# EAGLE board Bartosz_Nowakowski (EAGLE 9.6.0)
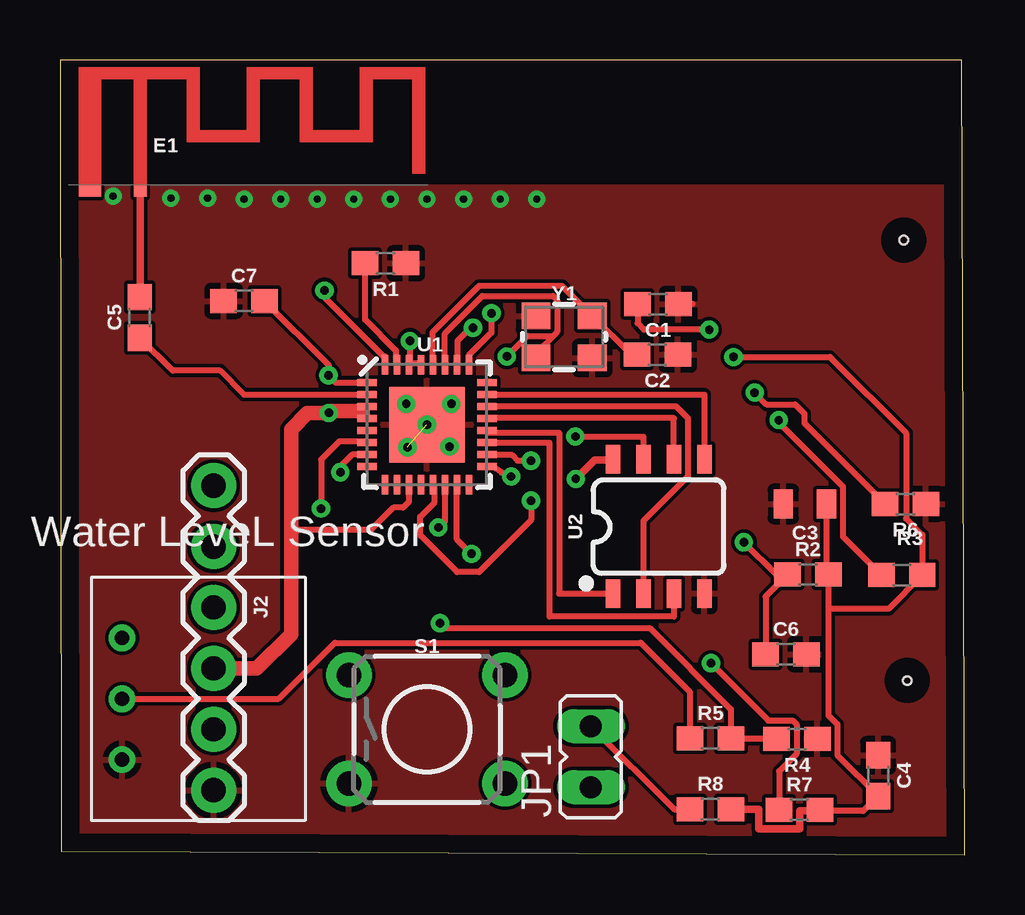
[diagram p0: board, top side]
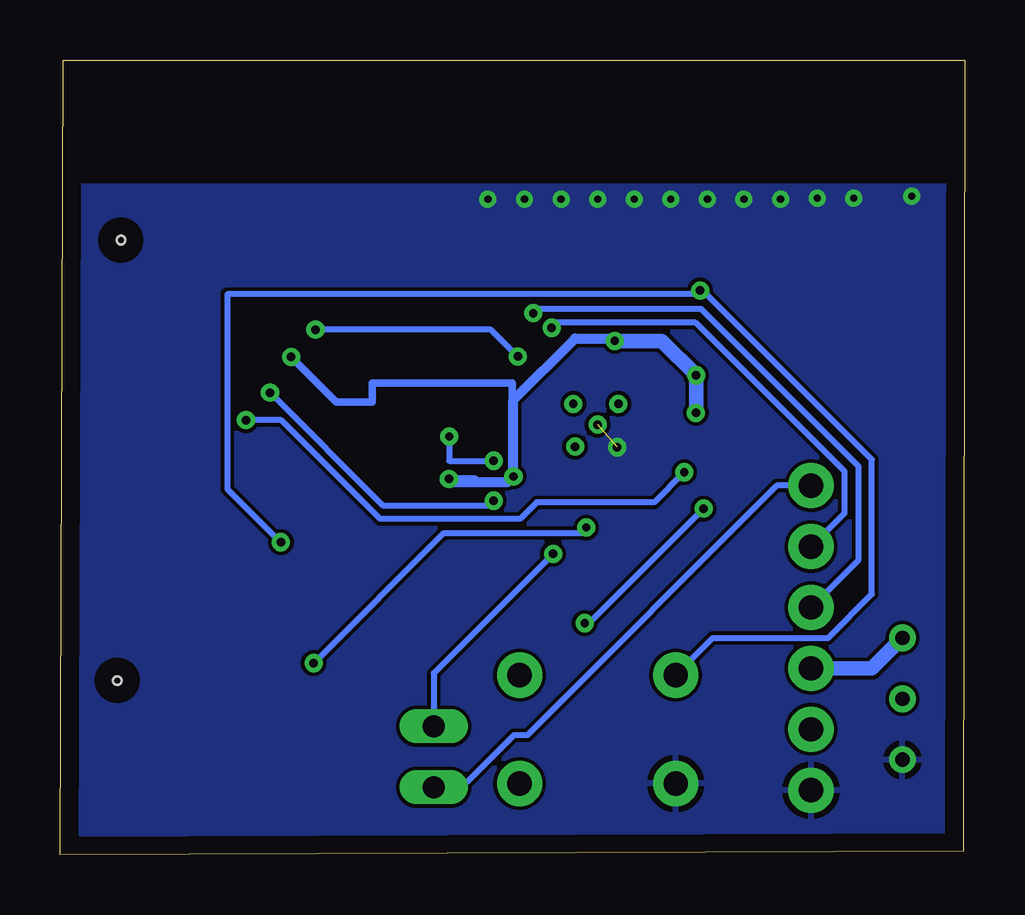
[diagram p1: board, bottom side, seen from below]

Size 37.69 x 33.14 mm. Coordinates in mm from the lower left corner, seen from the top.
Outline: 0.05,0.15 37.69,0 37.57,33.14 0,33.14 0.05,0.15
Copper layers (1*16): Top 0.035mm / dielectric 1.5mm / Bottom 0.035mm
Design rules "default *": minimum track width 10mil, minimum drill 0.35mm, track to track 6mil, track to pad 6mil, pad to pad 6mil, via to via 6mil, smd to smd 6mil, copper to edge 30mil, drill to drill 6mil, minimum pad ring 10mil, minimum via ring 8mil, stop-mask expansion 4mil, vias tented up to drill 0mil, thermal gap 10mil
Holes 0.35 mm at 35.15,25.63 35.31,7.26

## Footprints (pad centres in the part's own frame; a part is rotated, then mirrored left to right if it is on the bottom)
0603 = smd 1.1 x 1: 1 -0.85,0; 2 0.85,0
0805 = smd 0.8 x 1.2: 1 -0.9,0; 2 0.9,0
TRACE_ANTENNA_2.4GHZ_15.2MM = smd 0.5 x 0.5: ANT 0,-0.25 | smd 0.9 x 0.5: GND -2.1,-0.25
FTDI_BASIC = drill 1.016 pad 1.88: CTS 10.16,0; DTR 0,0; GND 12.7,0; RXI 2.54,0; TXO 5.08,0; VCC 7.62,0
JP1 = drill 0.914 long: 1 0,-1.27; 2 0,1.27
TACTILE_SWITCH_PTH_6.0MM_KIT = drill 1.016 pad 1.88: 1 -3.251,2.261; 2 3.251,2.261; 3 -3.251,-2.261; 4 3.251,-2.261
QFN32-5X5MM = smd 0.8 x 0.285: 1 -2.5,1.75; 2 -2.5,1.25; 3 -2.5,0.75; 4 -2.5,0.25; 5 -2.5,-0.25; 6 -2.5,-0.75; 7 -2.5,-1.25; 8 -2.5,-1.75; 17 2.5,-1.75; 18 2.5,-1.25; 19 2.5,-0.75; 20 2.5,-0.25; 21 2.5,0.25; 22 2.5,0.75; 23 2.5,1.25; 24 2.5,1.75 | smd 0.285 x 0.8: 9 -1.75,-2.5; 10 -1.25,-2.5; 11 -0.75,-2.5; 12 -0.25,-2.5; 13 0.25,-2.5; 14 0.75,-2.5; 15 1.25,-2.5; 16 1.75,-2.5; 25 1.75,2.5; 26 1.25,2.5; 27 0.75,2.5; 28 0.25,2.5; 29 -0.25,2.5; 30 -0.75,2.5; 31 -1.25,2.5; 32 -1.75,2.5 | smd 3.15 x 3.15: EP 0,0
SO08 = smd 0.6 x 1.2: 1 -1.905,-2.8; 2 -0.635,-2.8; 3 0.635,-2.8; 4 1.905,-2.8; 5 1.905,2.8; 6 0.635,2.8; 7 -0.635,2.8; 8 -1.905,2.8
WATERLEVELSENSORFT = drill 0.6: GND -7.62,-2.54; OUT -7.62,0; VCC -7.62,2.54
CRYSTAL-SMD-3.2X2.5MM = smd 1.2 x 1.1: 1 -1.175,-0.875; 2 1.175,-0.875; 3 1.175,0.875; 4 -1.175,0.875

## Placement (x,y rotation side)
C1  10pF  [0603]  24.92,22.96 180 top
C2  10pF  [0603]  24.89,20.85 180 top
C3  10uF  [0805]  31.04,14.63 180 top
C4  0.1uF  [0603]  34.09,3.3 270 top
C5  5.6PF  [0603]  3.33,22.4 90 top
C6  0.1uF  [0603]  30.25,8.36 0 top
C7  0.1uF  [0603]  7.67,23.09 0 top
E1  ANTENNA-GROUNDEDTRACE-15.2MM  [TRACE_ANTENNA_2.4GHZ_15.2MM]  3.35,27.94 0 top
J2  6_PIN_SERIAL_CABLEPTH  [FTDI_BASIC]  6.4,15.39 270 top
JP1  1  [JP1]  22.12,4.09 0 top
R1  12k  [0603]  13.56,24.66 180 top
R2  10k  [0603]  31.17,11.68 0 top
R3  10k  [0603]  35.08,11.66 0 top
R4  100k  [0603]  30.71,4.83 180 top
R5  220k  [0603]  27.1,4.85 0 top
R6  10k  [0603]  35.23,14.63 180 top
R7  12k  [0603]  30.81,1.88 0 top
R8  1k  [0603]  27.1,1.91 0 top
S1  MOMENTARY-SWITCH-SPST-PTH-6.0MM-KIT  [TACTILE_SWITCH_PTH_6.0MM_KIT]  15.29,5.23 0 top
U1  ESP8266  [QFN32-5X5MM]  15.29,17.93 0 top
U2  4MB Flash  [SO08]  24.94,13.69 0 top
WATER1  WATERLEVELSENORDEV  [WATERLEVELSENSORFT]  10.21,6.5 0 top
Y1  CRYSTAL-26MHZSMD-3.2X2.5  [CRYSTAL-SMD-3.2X2.5MM]  21.01,21.59 0 top

## Library data of the parts
C1 C2 = SparkFun-Capacitors; PROD_ID: CAP-11812
C3 = SparkFun-Capacitors; PROD_ID: CAP-11330
C4 C6 C7 = SparkFun-Capacitors; PROD_ID: CAP-08604
C5 = SparkFun-Capacitors; PROD_ID: CAP-12456
E1 = SparkFun-RF
J2 = SparkFun-Connectors
JP1 = jumper
R1 R7 = SparkFun-Resistors; PROD_ID: RES-10327
R2 R3 R6 = SparkFun-Resistors; PROD_ID: RES-00824
R4 = SparkFun-Resistors; PROD_ID: RES-07828
R5 = SparkFun-Resistors; PROD_ID: RES-08969
R8 = SparkFun-Resistors; PROD_ID: RES-07856
S1 = SparkFun-Switches; PROD_ID: SWCH-08441; SF_SKU: COM-00097
U1 = SparkFun-RF; PROD_ID: IC-12452
U2 = SparkFun-IC-Memory; PROD_ID: IC-12455
WATER1 = WaterLevel
Y1 = SparkFun-Clocks; PROD_ID: XTAL-12454

## Nets
+3V3: C3.1 C4.2 C7.2 J2.VCC R2.2 R3.2 R7.2 R8.2 U1.1 U1.3 U1.4 U1.11 U1.17 U1.29 U1.30 U2.8 WATER1.VCC
GND: C1.1 C2.1 C3.2 C4.1 C6.2 C7.1 E1.GND J2.GND R1.1 R4.1 R6.1 S1.3 U1.EP U2.4 WATER1.GND Y1.2 Y1.4
GPIO0: JP1.2 R8.1 U1.15
GPIO2: R7.1 U1.14
GPIO15: R6.2 U1.13
N$1: R1.2 U1.31
N$2: C1.2 U1.27 Y1.1
N$3: C2.2 U1.28 Y1.3
N$4: R3.1 U1.7
N$5: C6.1 R2.1 S1.1 U1.32
N$6: C5.1 U1.2
N$7: C5.2 E1.ANT
N$8: R4.2 R5.2 U1.6
N$9: R5.1 WATER1.OUT
N$10: J2.DTR JP1.1
SD_CLK: U1.21 U2.6
SD_CS0: U1.20 U2.1
SD_HD: U1.18 U2.7
SD_SI: U1.23 U2.5
SD_SO: U1.22 U2.2
SD_WP: U1.19 U2.3
U0RXI: J2.TXO U1.25
U0TXO: J2.RXI U1.26

## Tracks (layer width: path | path; a pad name or v marks a point on that pad's centre or on a via)
+3V3  (via drill 0.35)
  Top 0.254: R7.2 31.71,1.83 31.88,1.83 33.46,1.83 C4.2 32.39,4.15 32.39,5.44 32.02,5.81 32.02,10.26 | U1.29 14.97,20.47 14.66,20.47 14.58,20.45 | v18.8,15.77 18.4,15.93 17.98,16.2 U1.17 | v14.58,21.43 14.58,20.45 | 14.58,20.45 U1.30 | 23.04,16.47 U2.8 | C7.2 11.19,20.42 v11.19,19.99 11.5,19.68 U1.1 | U1.11 14.54,14.72 14.3,14.48 13.89,14.48 12.95,13.54 9.93,13.54 9.63,13.23 | 10.31,18.42 10.32,18.42 | 11.27,18.49 v11.2,18.42 | 12.6,18.49 U1.3 U1.4 | 32.02,10.26 R2.2 31.94,11.76 C3.1 | 32.02,10.26 34.53,10.26 R3.2 35.93,13.34 35.25,14.01 35.25,17.58 32.16,20.68 32.07,20.76 v28.06,20.76
  Top 0.305: R8.2 29.11,1.91 29.11,1.07 30.81,1.07 30.81,1.83 31.88,1.83 | v21.49,15.67 22.28,16.47 23.04,16.47
  Top 0.61: J2.VCC 8.2,7.77 9.63,9.19 9.63,13.23 9.63,17.73 10.31,18.42 | 10.32,18.42 v11.2,18.42 | 11.27,18.49 12.6,18.49
  Bottom 0.305: v28.06,20.76 26.18,18.88 24.67,18.88 24.67,19.67 18.84,19.67 18.84,15.57 20.41,15.57 20.41,15.67 v21.49,15.67
  Bottom 0.406: v14.58,21.43 14.68,21.53 16.23,21.53 18.82,18.94 18.82,15.8 v18.8,15.77 19.02,15.54 21.36,15.54 v21.49,15.67
  Bottom 0.61: WATER1.VCC 3.86,7.77 J2.VCC | v14.58,21.43 12.62,21.43 v11.19,19.99 11.19,18.44 v11.2,18.42
GND  (via drill 0.3, 0.35)  (1 unrouted)
  Top 0.254: 14.36,24.66 R1.1 14.16,24.66 | 1.29,27.78 E1.GND | 36.02,14.63 R6.1 | 25.69,20.85 C2.1 | 26.35,22.96 C1.1 | 19.89,22.54 Y1.4 | 22.28,20.8 Y1.2 | 31.04,8.36 C6.2
  other vias: 14.48,16.99 2.21,27.46 4.62,27.38 6.15,27.38 7.67,27.33 9.19,27.33 10.72,27.33 12.24,27.33 13.77,27.33 15.29,27.33 16.81,27.33 18.34,27.33 19.86,27.33
  pour Bottom: 0.05,27.86 37.44,27.86 37.44,0.15 0.05,0.15
  pour Top: 0.05,27.84 37.41,27.84 37.41,0.15 0.05,0.15
GND1  (via drill 0.35)
  other vias: 16.23,17.02
GND2  (via drill 0.35)
  other vias: 14.43,18.8
GND3  (via drill 0.35)
  other vias: 15.29,17.93
GND4  (via drill 0.35)
  other vias: 16.31,18.8
GPIO0  (via drill 0.35)
  Top 0.254: v17.14,12.55 16.54,13.15 U1.15 | R8.1 25.58,1.9 JP1.2
  Bottom 0.254: JP1.2 22.12,7.57 v17.14,12.55
GPIO2  (via drill 0.35)
  Top 0.254: U1.14 16.03,13.91 v15.77,13.65 | v27.13,7.99 29.51,5.61 30.52,5.61 30.69,5.44 30.69,4.21 29.96,3.48 R7.1
  Bottom 0.254: v15.77,13.65 16,13.42 21.7,13.42 v27.13,7.99
GPIO15  (via drill 0.35)
  Top 0.254: U1.13 15.61,15.39 15.61,14.69 15.01,14.09 15.01,13.33 16.55,11.79 17.46,11.79 19.63,13.96 v19.63,14.76 | v28.94,19.27 29.43,18.78 30.63,18.78 31.01,18.4 31.01,18 R6.2
  Bottom 0.254: v19.63,14.76 19.82,14.57 24.25,14.57 v28.94,19.27
N$1
  Top 0.254: U1.31 14,20.52 14,21.02 12.71,22.31 R1.2
N$2  (via drill 0.35)
  Top 0.254: Y1.1 19.83,20.92 20.55,21.64 | v18.62,20.78 19.48,21.64 20.55,21.64 | 20.55,21.64 20.71,21.8 20.71,23.13 20.55,23.29 17.6,23.29 16.04,21.73 U1.27 | v27.05,21.89 24.33,21.89 24.07,22.16 C1.2
  Bottom 0.254: v18.62,20.78 19.74,21.89 v27.05,21.89
N$3
  Top 0.254: U1.28 15.52,20.46 15.52,21.78 17.45,23.72 20.93,23.72 Y1.3 23.79,20.85 C2.2
N$4  (via drill 0.35)
  Top 0.254: U1.7 12.17,16.69 11.68,16.2 v11.68,15.95 | v29.95,18.12 29.95,18.02 32.62,15.35 32.62,13.27 R3.1
  Bottom 0.254: v11.68,15.95 12.94,14.69 17.83,14.69 18.52,14 24.36,14 28.48,18.12 v29.95,18.12
N$5  (via drill 0.35)
  Top 0.254: v11.02,23.53 11,23.5 11,23.27 13.49,20.78 13.54,20.78 U1.32 | v28.49,13.03 29.84,11.68 R2.1 29.4,10.77 C6.1
  Bottom 0.254: S1.1 10.49,9.04 5.69,9.04 3.86,10.87 3.86,16.48 10.91,23.53 v11.02,23.53 11.02,23.43 11.07,23.37 30.72,23.37 30.72,15.26 v28.49,13.03
N$6
  Top 0.254: U1.2 7.67,19.18 6.67,20.18 4.7,20.18 C5.1
N$7
  Top 0.305: E1.ANT 3.35,23.28 C5.2
N$8  (via drill 0.35)
  Top 0.254: U1.6 12.73,17.24 11.64,17.24 10.88,16.48 v10.88,14.43 | v15.83,9.66 15.83,9.43 24.59,9.43 27.95,6.07 R5.2 27.98,4.83 R4.2
  Bottom 0.254: v15.83,9.66 15.83,9.48 v10.88,14.43
N$9
  Top 0.254: WATER1.OUT 9.11,6.5 11.45,8.84 24.19,8.84 26.25,6.78 R5.1
N$10
  Bottom 0.254: JP1.1 20.95,2.82 18.78,4.99 18.22,4.99 7.82,15.39 J2.DTR
SD_CLK
  Top 0.254: U2.6 25.58,18.21 17.82,18.21 U1.21
SD_CS0
  Top 0.254: U1.20 17.82,17.71 17.82,17.6 20.79,17.6 20.79,10.89 U2.1
SD_HD  (via drill 0.35)
  Top 0.254: U1.18 17.83,16.66 18.84,16.66 19.07,16.43 v19.63,16.43 | v21.48,17.44 24.31,17.44 U2.7
  Bottom 0.254: v19.63,16.43 21.48,16.43 v21.48,17.44
SD_SI
  Top 0.254: U2.5 26.85,19.18 U1.23
SD_SO
  Top 0.254: U1.22 17.81,18.7 25.66,18.7 26.16,18.2 26.16,15.77 24.31,13.93 U2.2
SD_WP
  Top 0.254: U2.3 25.58,9.94 20.39,9.94 20.39,17.19 U1.19
U0RXI  (via drill 0.35)
  Top 0.254: v17.98,22.58 17.98,21.77 17.04,20.83 U1.25
  Bottom 0.254: v17.98,22.58 17.79,22.77 10.99,22.77 4.42,16.19 4.42,12.29 J2.TXO
U0TXO  (via drill 0.35)
  Top 0.254: v17.21,21.97 17.11,21.97 16.56,21.43 16.56,20.47 U1.26
  Bottom 0.254: J2.RXI 5,14.25 5,15.97 11.21,22.18 17.15,22.18 17.21,22.12 v17.21,21.97